# Altium PCB 400797.PcbDoc (part 3 of 8)
Units mm, origin at the board's own origin, x right, y up, seen from the top; angles counter-clockwise.
Board outline 155 x 63.5 mm, 4 copper layers (Top Layer, Mid-Layer 1, Mid-Layer 2, Bottom Layer), stack 1.514 mm thick; 333 components, 292 nets, 1555 pads, 2205 vias.
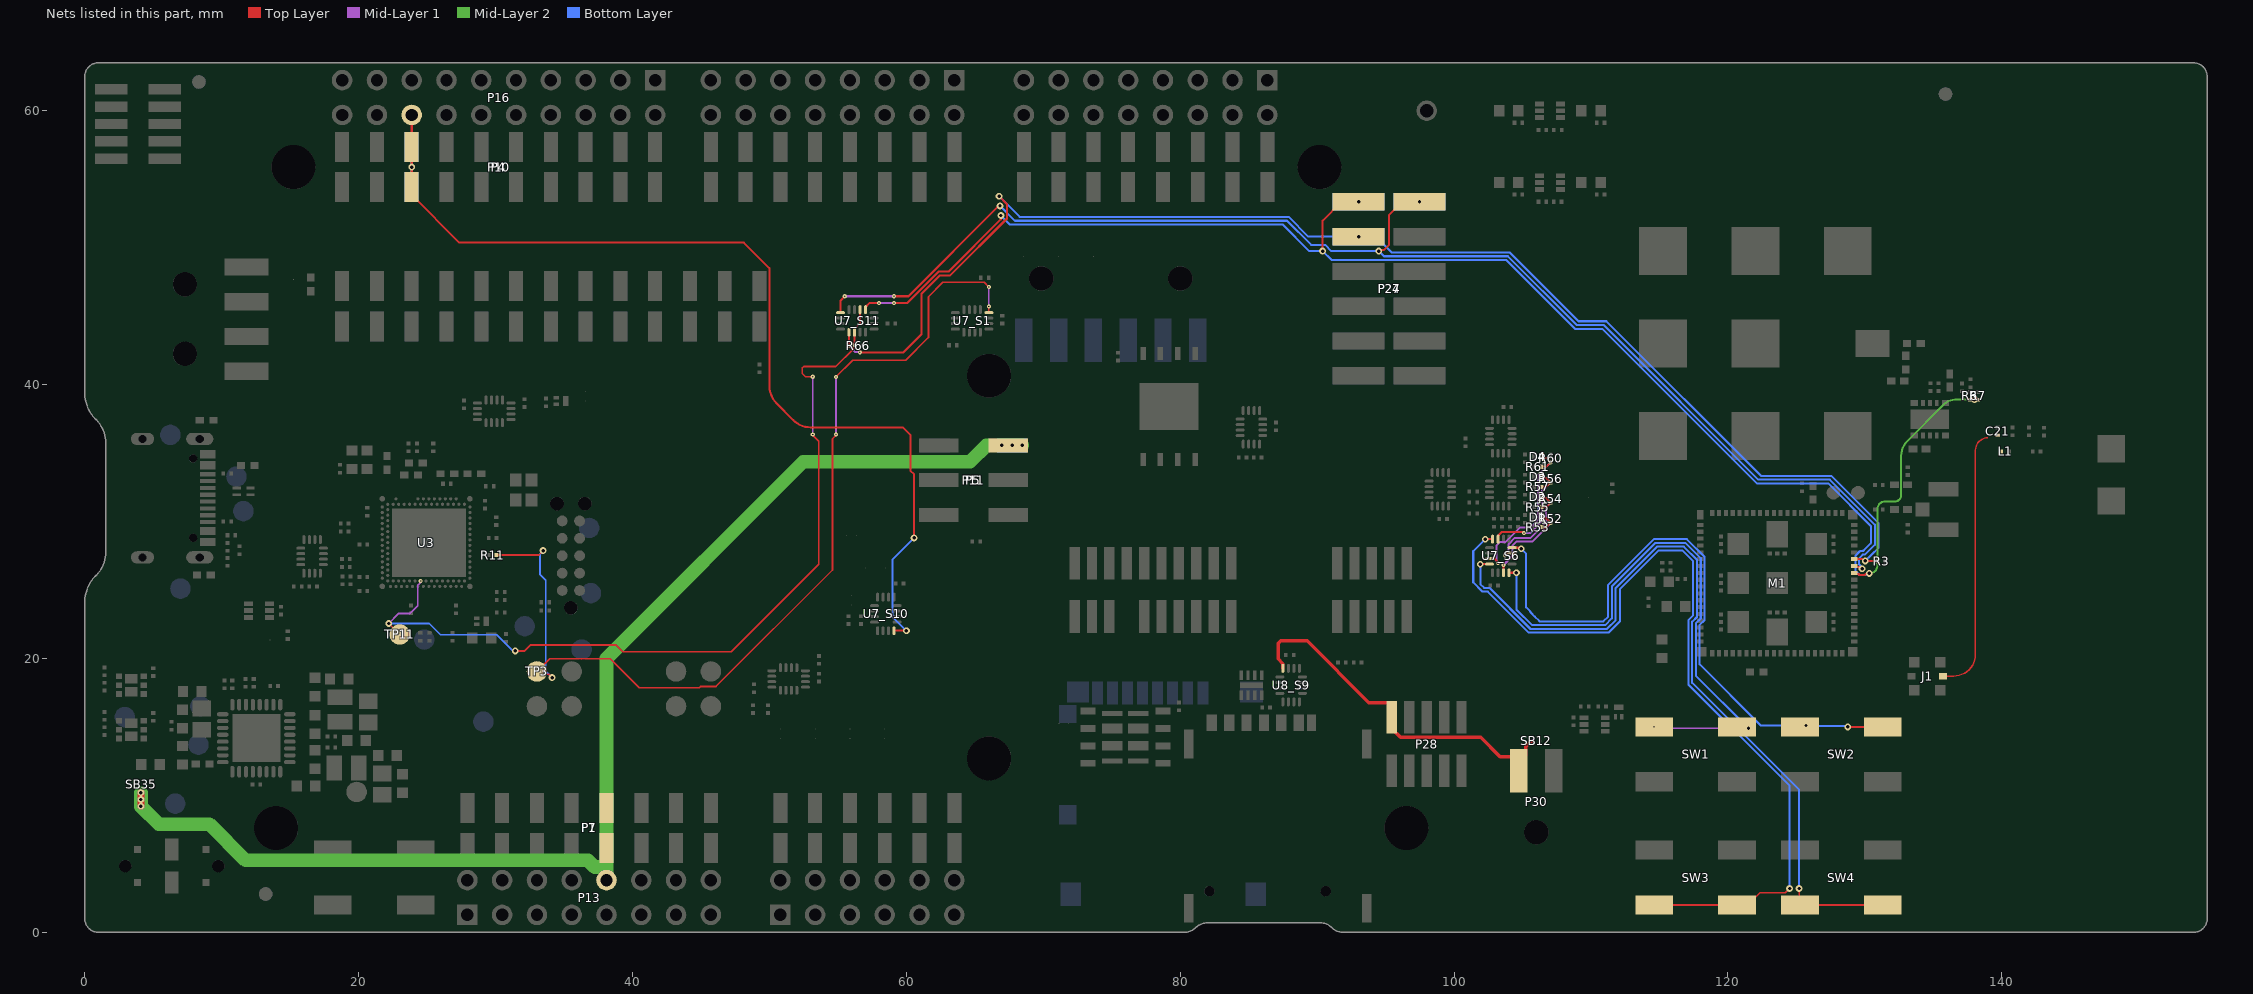
[diagram p4: the nets of this part, all layers, seen from the top]

## Part data (continued)
LOGO2: "Segger logo, small size", Manufacturer=N.A., Part number NEMS=101100004, Artikkelnr Noca=N.A., Author=rsk, Component Class=Markings, Component Status=Active, ComponentLink1Description=Datasheet, ComponentLink1URL=N.A., ComponentLink2Description="Supplier link", ComponentLink2URL=N.A., Footprint Doc="Segger Logo S", HelpURL=N.A., LatestRevisionDate=2016-09-07, Manufacturer Part Number=N.A., Note=N.A., Pad Count=0, Part Number="Segger Logo S", Part number IPS=N.A., Part number Norautron=N.A., PartId=101100004, Published=2016-09-07, Supplier 1=N.A., Supplier 2=N.A., Supplier Part Number 1=N.A., Supplier Part Number 2=N.A.
LOGO3: library part "Nordic Logo lying", "Nordic logo lying", Manufacturer=N.A., Part number NEMS=101100001, Artikkelnr Noca=N.A., Author=rsk, Component Class=Markings, Component Status=Active, ComponentLink1Description=Datasheet, ComponentLink1URL=N.A., ComponentLink2Description="Supplier link", ComponentLink2URL=N.A., Footprint Doc="Nordic Logo", HelpURL=N.A., LatestRevisionDate=2017-03-20, Manufacturer Part Number=N.A., Note=N.A., Pad Count=0, Part Number="Nordic Logo lying", Part number IPS=N.A., Part number Norautron=N.A., PartId=101100001, Published=2017-09-01, Supplier 1=N.A., Supplier 2=N.A., Supplier Part Number 1=N.A., Supplier Part Number 2=N.A.
M1: "Low power System-in-Package with integrated LTE-M/NB-IoT modem and GPS", Manufacturer="Nordic Semiconductor", Part number IPS=N.A., Artikkelnr Noca=N.A., Author=kod1, Component Class=Nordic_Devices, Component Status=Active, ComponentLink1Description=Datasheet, ComponentLink1URL=N.A., ComponentLink2Description="Supplier link", ComponentLink2URL=N.A., Footprint Doc=LGA-113, HelpURL=N.A., LatestRevisionDate=2024-04-29, Manufacturer Part Number=nRF9151-LACAA0A, Note=N.A., Pad Count=113, Part Number=nRF9151-LACAA0A, Part number Norautron=N.A., Published=2024-04-29, Supplier 1="Nordic Semiconductor", Supplier 2=N.A., Supplier Part Number 1=nRF9151-LACAA0A, Supplier Part Number 2=N.A.
P1 P3 P6: library part "Socket 1x8 SMD", "Socket 1x8, 2.54mm (100mil), SMD", Manufacturer=WCON, Manufacturer Part Number=2171-108MS0CUNR1, Part number IPS=00000009963, Part number NEMS=100500412, Part number Norautron=26032369, Artikkelnr Noca=55030002, Author=rsk, Component Class=Connectors, Component Status=Active, ComponentLink1Description=Datasheet, ComponentLink1URL=N.A., ComponentLink2Description="Supplier link", ComponentLink2URL=N.A., Footprint Doc=SOCKET_1x8_SMD, HelpURL=N.A., LatestRevisionDate=2017-10-23, Note=N.A., Pad Count=8, Part Number="Socket 1x8 SMD", PartId=100500412, Published=2016-01-22, Supplier 1=Cabcon, Supplier 2=Samtec, Supplier Part Number 1=2171-108MS0CUNR1, Supplier Part Number 2=SSM-108-F-SV-P-TR, System=Connector
P2: library part "Socket 1x6 SMD", "Socket 1x6, 2.54mm (100mil), SMD", Manufacturer=WCON, Manufacturer Part Number=2171-106MS0CUNR1, Part number IPS=00000009964, Part number NEMS=100500408, Part number Norautron=26032370, Artikkelnr Noca=55030001, Author=rsk, Component Class=Connectors, Component Status=Active, ComponentLink1Description=Datasheet, ComponentLink1URL=N.A., ComponentLink2Description="Supplier link", ComponentLink2URL=N.A., Footprint Doc=SOCKET_1x6_SMD, HelpURL=N.A., LatestRevisionDate=2017-10-23, Note=N.A., Pad Count=6, Part Number="Socket 1x6 SMD", PartId=100500408, Published=2016-01-22, Supplier 1=Cabcon, Supplier 2=Samtec, Supplier Part Number 1=2171-106MS0CUNR1, Supplier Part Number 2=SSM-106-F-SV-P-TR, System=Connector
P4: library part "Socket 1x10 SMD", "Socket 1x10, 2.54mm (100mil), SMD", Manufacturer=WCON, Manufacturer Part Number=2171-110MS0CUNR1, Part number IPS=00000009965, Part number NEMS=100500416, Part number Norautron=26032371, Artikkelnr Noca=55030004, Author=rsk, Component Class=Connectors, Component Status=Active, ComponentLink1Description=Datasheet, ComponentLink1URL=N.A., ComponentLink2Description="Supplier link", ComponentLink2URL=N.A., Footprint Doc=SOCKET_1x10_SMD, HelpURL=N.A., LatestRevisionDate=2016-01-22, Note=N.A., Pad Count=10, Part Number="Socket 1x10 SMD", PartId=100500416, Published=2016-01-22, Supplier 1=Cabcon, Supplier 2=Samtec, Supplier Part Number 1=2171-110MS0CUNR1, Supplier Part Number 2=SSM-110-F-SV-P-TR, System=Connector
P5: library part "Pin Header 2x3 SMD", "Pin Header 2x3, 2.54mm (100mil) SMD", Manufacturer=WCON, Manufacturer Part Number=1125-1203S0M116R1, Part number IPS=00000009966, Part number NEMS=100500242, Part number Norautron=N.A., Artikkelnr Noca=55010007, Author=rsk, Component Class=Connectors, Component Status=Active, ComponentLink1Description=Datasheet, ComponentLink1URL=N.A., ComponentLink2Description="Supplier link", ComponentLink2URL=N.A., Footprint Doc=HDR_2x3-SMD, HelpURL=\\hizz\pro\app9717\Datasheet\connectors\W-CON\1125-12XXXXMXXXXX.PDF, LatestRevisionDate=2016-01-22, Note=SMD, Pad Count=6, Part Number="Pin Header 2x3 SMD", PartId=100500242, Published=2016-01-22, Supplier 1=Cabcon, Supplier 2=Samtec, Supplier Part Number 1=1125-1203S0M116R1, Supplier Part Number 2=TSM-103-01-L-DV, System=Connector
P7 P9 P12: library part "Pin List 1x8 SMD, N.C.", "Pin List 1x8, 2.54mm (100mil), SMD", Manufacturer=WCON, Manufacturer Part Number=1125-1108S0M116R2, Part number IPS=N.A., Part number NEMS=100500330, Artikkelnr Noca=55010006, Assembly="Not mounted", Author=rsk, Component Class=Connectors, Component Status=Active, ComponentLink1Description=Datasheet, ComponentLink1URL=N.A., ComponentLink2Description="Supplier link", ComponentLink2URL=N.A., Footprint Doc=LIST_1x8_SMD, HelpURL=\\hizz\pro\app9717\Datasheet\connectors\W-CON\1125-11XXXXMXXXXX.pdf, LatestRevisionDate=2016-01-22, Note=N.A., Pad Count=8, Part Number="Pin List 1x8 SMD, N.C.", Part number Norautron=N.A., PartId=100500330, Published=2016-01-22, Supplier 1=Cabcon, Supplier 2=Samtec, Supplier Part Number 1=1125-1108S0M116R2, Supplier Part Number 2=TSM-108-01-L-SV-P-TR, System=Connector
P8: library part "Pin List 1x6 SMD, N.C.", "Pin List 1x6, 2.54mm (100mil), SMD", Manufacturer=WCON, Manufacturer Part Number=1125-1106S0M116R2, Part number IPS=N.A., Part number NEMS=100500321, Artikkelnr Noca=55010026, Assembly="Not mounted", Author=rsk, Component Class=Connectors, Component Status=Active, ComponentLink1Description=Datasheet, ComponentLink1URL=N.A., ComponentLink2Description="Supplier link", ComponentLink2URL=N.A., Footprint Doc=LIST_1x6_SMD, HelpURL=\\hizz\pro\app9717\Datasheet\connectors\W-CON\1125-11XXXXMXXXXX.pdf, LatestRevisionDate=2016-03-29, Note=N.A., Pad Count=6, Part Number="Pin List 1x6 SMD, N.C.", Part number Norautron=N.A., PartId=100500321, Published=2016-03-29, Supplier 1=Cabcon, Supplier 2=Samtec, Supplier Part Number 1=1125-1106S0M116R2, Supplier Part Number 2=TSM-106-01-L-SV-P-TR, System=Connector
P10: library part "Pin List 1x10 SMD, N.C.", "Pin List 1x10, 2.54mm (100mil), SMD", Manufacturer=WCON, Manufacturer Part Number=1125-1110S0M116R2, Part number IPS=N.A., Part number NEMS=100500338, Artikkelnr Noca=55010028, Assembly="Not mounted", Author=rsk, Component Class=Connectors, Component Status=Active, ComponentLink1Description=Datasheet, ComponentLink1URL=N.A., ComponentLink2Description="Supplier link", ComponentLink2URL=N.A., Footprint Doc=LIST_1x10_SMD, HelpURL=\\hizz\pro\app9717\Datasheet\connectors\W-CON\1125-11XXXXMXXXXX.pdf, LatestRevisionDate=2016-03-29, Note=N.A., Pad Count=10, Part Number="Pin List 1x10 SMD, N.C.", Part number Norautron=N.A., PartId=100500338, Published=2016-03-29, Supplier 1=Cabcon, Supplier 2=Samtec, Supplier Part Number 1=1125-1110S0M116R2, Supplier Part Number 2=TSM-110-01-L-SV-P-TR, System=Connector
P11: library part "Socket 2x3 SMD Bottom, N.C.", "Socket 2x3, 2.54mm (100mil), SMD", Manufacturer=WCON, Manufacturer Part Number=2171-203MS0CUNR1, Part number IPS=N.A., Part number NEMS=100500434, Artikkelnr Noca=55030010, Assembly="Not mounted", Author=rsk, Component Class=Connectors, Component Status=Active, ComponentLink1Description=Datasheet, ComponentLink1URL=N.A., ComponentLink2Description="Supplier link", ComponentLink2URL=N.A., Footprint Doc=SOCKET_2x3_SMD-2.54mm-bottom, HelpURL=\\hizz\pro\app9717\Datasheet\connectors\W-CON\2171-2XXMXXCUNXX.pdf, LatestRevisionDate=2016-03-29, Note=N.A., Pad Count=6, Part Number="Socket 2x3 SMD Bottom, N.C.", Part number Norautron=N.A., PartId=100500434, Published=2014-06-10, Supplier 1=Cabcon, Supplier 2=Samtec, Supplier Part Number 1=2171-203MS0CUNR1, Supplier Part Number 2=SSM-103-F-DV-P-TR, System=Connector
P13 P15 P17: library part "Pin Header 2x8, N.C.", "Pin Header 2x8, 2.54mm (100mil)", Manufacturer=N.A., Part number NEMS=100500270, Artikkelnr Noca=N.A., Assembly="Not mounted", Author=rsk, Component Class=Connectors, Component Status=Active, ComponentLink1Description=Datasheet, ComponentLink1URL=N.A., ComponentLink2Description="Supplier link", ComponentLink2URL=N.A., Footprint Doc=HDR_2x8, HelpURL=N.A., LatestRevisionDate=2009-12-12, Manufacturer Part Number=N.A., Note=N.A., Pad Count=16, Part Number="Pin Header 2x8, N.C.", Part number IPS=N.A., Part number Norautron=N.A., PartId=100500270, Published=2009-12-12, Supplier 1=N.A., Supplier 2=N.A., Supplier Part Number 1=N.A., Supplier Part Number 2=N.A., System=Connector
P14: library part "Pin Header 2x6, N.C.", "Pin Header 2x6, 2.54mm (100mil)", Manufacturer=N.A., Part number NEMS=100500265, Artikkelnr Noca=N.A., Assembly="Not mounted", Author=rsk, Component Class=Connectors, Component Status=Active, ComponentLink1Description=Datasheet, ComponentLink1URL=N.A., ComponentLink2Description="Supplier link", ComponentLink2URL=N.A., Footprint Doc=HDR_2x6, HelpURL=N.A., LatestRevisionDate=2014-07-04, Manufacturer Part Number=N.A., Note=N.A., Pad Count=12, Part Number="Pin Header 2x6, N.C.", Part number IPS=N.A., Part number Norautron=N.A., PartId=100500265, Published=2009-12-12, Supplier 1=N.A., Supplier 2=N.A., Supplier Part Number 1=N.A., Supplier Part Number 2=N.A., System=Connector
P16: library part "Pin Header 2x10, N.C.", "Pin Header 2x10, 2.54mm (100mil)", Manufacturer=N.A., Part number NEMS=100500274, Artikkelnr Noca=N.A., Assembly="Not mounted", Author=rsk, Component Class=Connectors, Component Status=Active, ComponentLink1Description=Datasheet, ComponentLink1URL=N.A., ComponentLink2Description="Supplier link", ComponentLink2URL=N.A., Footprint Doc=HDR_2x10, HelpURL=N.A., LatestRevisionDate=2017-02-02, Manufacturer Part Number=N.A., Note=N.A., Pad Count=20, Part Number="Pin Header 2x10, N.C.", Part number IPS=N.A., Part number Norautron=N.A., PartId=100500274, Published=2017-01-30, Supplier 1=N.A., Supplier 2=N.A., Supplier Part Number 1=N.A., Supplier Part Number 2=N.A., System=Connector
P18 P19: library part "Pin Header 2x5 SMD, 1.27mm, KS", "Pin Header 2x5, 1.27mm (50mil), SMD, Keying Shroud", Manufacturer=WCON, Manufacturer Part Number=3132-10MS0BK00R1, Part number IPS=00000009968, Part number NEMS=100500261, Part number Norautron=N.A., Artikkelnr Noca=55010009, Author=rsk, Component Class=Connectors, Component Status=Active, ComponentLink1Description=Datasheet, ComponentLink1URL=N.A., ComponentLink2Description="Supplier link", ComponentLink2URL=N.A., Footprint Doc=HDR_2x5-SMD-1.27mm, HelpURL=\\hizz\pro\app9717\Datasheet\connectors\W-CON\3132-XXMXXBK00XX.pdf, LatestRevisionDate=2016-04-21, Note=N.A., Pad Count=10, Part Number="Pin Header 2x5 SMD, 1.27mm, KS", PartId=100500261, Published=2016-01-22, Supplier 1=Cabcon, Supplier 2=Samtec, Supplier Part Number 1=3132-10MS0BK00R1, Supplier Part Number 2=FTSH-105-01-F-DV-K, System=Connector
P20: library part "Pin List 1x13 SMD", "Pin List 1x13, 2.54mm (100mil), SMD", Manufacturer=N.A., Part number IPS=00000002499, Part number NEMS=100500345, Supplier Part Number 1=1125-1113S0M116R2, Artikkelnr Noca=N.A., Author=rsk, Component Class=Connectors, Component Status=Active, ComponentLink1Description=Datasheet, ComponentLink1URL=N.A., ComponentLink2Description="Supplier link", ComponentLink2URL=N.A., Footprint Doc=LIST_1x13_SMD, HelpURL=N.A., LatestRevisionDate=2015-11-10, Manufacturer Part Number=N.A., Note=N.A., Pad Count=13, Part Number="Pin List 1x13 SMD", Part number Norautron=N.A., PartId=100500345, Published=2015-11-10, Supplier 1=Cabcon, Supplier 2=Samtec, Supplier Part Number 2=TSM-113-01-L-SV-P-TR, System=Connector
P22: library part "Pin List Ang 1x4 SMD, 2.54mm", "Pin List 1x4, 2.54mm (100mil), Right Angled, SMD", Manufacturer=WCON, Manufacturer Part Number=1125B-1104S0Z135CR02, Part number IPS=00000004780, Part number NEMS=100500358, Part number Norautron=N.A., Artikkelnr Noca=N.A., Author=rsk, Component Class=Connectors, Component Status=Active, ComponentLink1Description=Datasheet, ComponentLink1URL=N.A., ComponentLink2Description="Supplier link", ComponentLink2URL=N.A., Footprint Doc=LIST_ANG_1x4-SMD-2.54MM, HelpURL=N.A., LatestRevisionDate=2020-04-29, Note=N.A., Pad Count=4, Part Number="Pin List Ang 1x4 SMD, 2.54mm", PartId=100500358, Published=2015-01-23, Supplier 1=Cabcon, Supplier 2=Samtec, Supplier Part Number 1=1125B-1104S0Z135CR02, Supplier Part Number 2=TSM-104-01-L-SH-A, System=Connector
P24 P27: library part "Socket 2x6 SMD", "Socket 2x6, 2.54mm (100mil), SMD", Manufacturer=WCON, Manufacturer Part Number=2171-206MS0CUNR1, Part number IPS=N.A., Part number NEMS=100500439, Artikkelnr Noca=N.A., Author=rsk, Component Class=Connectors, Component Status=Active, ComponentLink1Description=Datasheet, ComponentLink1URL=N.A., ComponentLink2Description="Supplier link", ComponentLink2URL=N.A., Footprint Doc=SOCKET_2x6_SMD-2.54mm, HelpURL=N.A., LatestRevisionDate=2019-04-12, Note=N.A., Pad Count=12, Part Number="Socket 2x6 SMD", Part number Norautron=N.A., PartId=100500439, Published=2019-04-12, Supplier 1=Cabcon, Supplier 2=Samtec, Supplier Part Number 1=2171-206MS0CUNR1, Supplier Part Number 2=SSM-106-F-DV-P-TR, System=Connector
  P27: Assembly="Not mounted"
P25: library part "Pin Header 2x10 SMD, 1.27mm, KS, SWD (Cabcon)", "Pin Header 2x10, 1.27mm (50mil), SMD, Keying Shroud, Removed Pin 7", Manufacturer=WCON, Manufacturer Part Number=3132-20MS0BK00R3, Part number IPS=N.A., Part number NEMS=100500841,100500280, Artikkelnr Noca=N.A., Author=kod1, Component Class=Connectors, Component Status=Active, ComponentLink1Description=Datasheet, ComponentLink1URL=N.A., ComponentLink2Description="Supplier link", ComponentLink2URL=N.A., Footprint Doc=HDR_2x10-SMD-1.27mm-SWD, HelpURL=N.A., LatestRevisionDate=2023-12-14, Note=N.A., Pad Count=19, Part Number="Pin Header 2x10 SMD, 1.27mm, KS, SWD (Cabcon)", Part number Norautron=N.A., PartId=100500841, Published=2023-12-14, Supplier 1=Cabcon, Supplier 2=N.A., Supplier Part Number 1=3132-20MS0BK00R3, Supplier Part Number 2=N.A., System=Connector
P26: library part "Socket 1x13 SMD, N.C.", "Socket 1x13, 2.54mm (100mil), SMD", Manufacturer=WCON, Manufacturer Part Number=2171-113MS0CUNR1, Part number IPS=N.A., Part number NEMS=100500422, Artikkelnr Noca=N.A., Assembly="Not mounted", Author=rsk, Component Class=Connectors, Component Status=Active, ComponentLink1Description=Datasheet, ComponentLink1URL=N.A., ComponentLink2Description="Supplier link", ComponentLink2URL=N.A., Footprint Doc=SOCKET_1x13_SMD, HelpURL=N.A., LatestRevisionDate=2019-05-27, Note=N.A., Pad Count=13, Part Number="Socket 1x13 SMD, N.C.", Part number Norautron=N.A., PartId=100500422, Published=2019-05-27, Supplier 1=Cabcon, Supplier 2=Samtec, Supplier Part Number 1=2171-113MS0CUNR1, Supplier Part Number 2=SSM-113-L-SV-P-TR, System=Connector
P28: library part "Pin Header 2x5 SMD, 1.27mm", "Pin Header 2x5, 1.27mm (50mil), SMD", Manufacturer=WCON, Manufacturer Part Number=1325-1205S0M078R1, Part number IPS=00000009970, Part number NEMS=100500259, Part number Norautron=N.A., Artikkelnr Noca=55019196, Author=rsk, Component Class=Connectors, Component Status=Active, ComponentLink1Description=Datasheet, ComponentLink1URL=N.A., ComponentLink2Description="Supplier link", ComponentLink2URL=N.A., Footprint Doc=HDR_2x5-SMD-1.27mm, HelpURL=http://www.farnell.com/datasheets/81359.pdf, LatestRevisionDate=2016-04-21, Note=N.A., Pad Count=10, Part Number="Pin Header 2x5 SMD, 1.27mm", PartId=100500259, Published=2010-11-25, Supplier 1=Cabcon, Supplier 2=Farnell, Supplier Part Number 1=1325-1205S0M078R1, Supplier Part Number 2=166-7759, System=Connector
P29: library part "Pin List Ang 1x6 SMD, 2.54mm", "Pin List 1x6, 2.54mm (100mil), Right Angled, SMD", Manufacturer=N.A., Part number IPS=00000003922, Part number NEMS=100500362, Supplier Part Number 1=TSM-106-01-L-SH-A, Artikkelnr Noca=N.A., Assembly="Not mounted", Author=rsk, Component Class=Connectors, Component Status=Active, ComponentLink1Description=Datasheet, ComponentLink1URL=N.A., ComponentLink2Description="Supplier link", ComponentLink2URL=N.A., Footprint Doc=LIST_ANG_1x6-SMD-2.54MM, HelpURL=N.A., LatestRevisionDate=2020-04-28, Manufacturer Part Number=N.A., Note=N.A., Pad Count=6, Part Number="Pin List Ang 1x6 SMD, 2.54mm", Part number Norautron=N.A., PartId=100500362, Published=2015-01-23, Supplier 1=Samtec, Supplier 2=Digi-Key, Supplier Part Number 2=S1113E-06-ND, System=Connector
P30: library part "Pin List Ang 1x2 SMD, 2.54mm", "Pin List 1x2, 2.54mm (100mil), Right Angled, SMD", Manufacturer=WCON, Manufacturer Part Number=1125B-1102S0Z135R2, Part number IPS=00000009972, Part number NEMS=100500354, Part number Norautron=N.A., Artikkelnr Noca=55010023, Author=rsk, Component Class=Connectors, Component Status=Active, ComponentLink1Description=Datasheet, ComponentLink1URL=N.A., ComponentLink2Description="Supplier link", ComponentLink2URL=N.A., Footprint Doc=LIST_ANG_1x2-SMD-2.54MM, HelpURL=\\hizz\pro\app9717\Datasheet\connectors\W-CON\1125B-11XXXXZXXXXX.pdf, LatestRevisionDate=2016-05-26, Note=N.A., Pad Count=2, Part Number="Pin List Ang 1x2 SMD, 2.54mm", PartId=100500354, Published=2016-01-22, Supplier 1=Cabcon, Supplier 2=Samtec, Supplier Part Number 1=1125B-1102S0Z135R2, Supplier Part Number 2=TSM-102-01-L-SH-A, System=Connector
Q1 Q7: "Dual N & P Ch MOFET, 1.03A/0.7A, 480mOhm, 450mW", Manufacturer="Diodes Incorporated", Part number IPS=00000007803, Part number NEMS=101300117, Part number Norautron=N.A., Supplier Part Number 1=DMC2400UV-7DICT-ND, Artikkelnr Noca=N.A., Author=rsk, Component Class=Semiconductors, Component Status=Active, ComponentLink1Description=Datasheet, ComponentLink1URL=N.A., ComponentLink2Description="Supplier link", ComponentLink2URL=N.A., Footprint Doc=SOT-563, HelpURL=http://www.diodes.com/_files/datasheets/DMC2400UV.pdf, LatestRevisionDate=2016-01-18, Manufacturer Part Number=DMC2400UV, Note="Dual N & P Channel Digital FET", Pad Count=6, Part Number=DMC2400UV, PartId=101300117, Published=2016-01-18, Supplier 1=Digi-Key, Supplier 2=N.A., Supplier Part Number 2=N.A.
Q2 Q3 Q6: "N-Channel MOSFET, 20V, 1A, 470mOhm, 400mW", Manufacturer="Rohm Semiconductor", Part number IPS=00000009976, Part number NEMS=101300132, Part number Norautron=26320026, Supplier Part Number 1=RV2C010UNT2LCT-ND, Artikkelnr Noca=35010020, Author=rsk, Component Class=Semiconductors, Component Status=Active, ComponentLink1Description=Datasheet, ComponentLink1URL=N.A., ComponentLink2Description="Supplier link", ComponentLink2URL=N.A., Footprint Doc=DFN-3, HelpURL=http://rohmfs.rohm.com/en/products/databook/datasheet/discrete/transistor/mosfet/rv2c010unt2l-e.pdf, LatestRevisionDate=2016-08-09, Manufacturer Part Number=RV2C010UNT2L, Note=N.A., Pad Count=3, Part Number=RV2C010UNT2L, PartId=101300132, Published=2016-08-09, Supplier 1=Digi-Key, Supplier 2=Mouser, Supplier Part Number 2=755-RV2C010UNT2L
Q4 Q5: "Dual N-Channel MOSFET, Vds = 30V, Vgs(th) = 1.5V, Id = 0.5A, Rds = 750mOhm, Pd = 150mW", Manufacturer="Micro Commercial Components", Manufacturer Part Number=UM6X1NA-TP, Part number IPS=N.A., Part number NEMS=101300201, Supplier Part Number 1=353-UM6X1NA-TPCT-ND, Artikkelnr Noca=N.A., Author=rubr, Component Class=Semiconductors, Component Status=Active, ComponentLink1Description=Datasheet, ComponentLink1URL=https://www.mccsemi.com/pdf/Products/UM6X1NA(SOT-563).pdf, ComponentLink2Description="Supplier link", ComponentLink2URL=https://www.digikey.com/en/products/detail/micro-commercial-co/UM6X1NA-TP/16399159, Footprint Doc=SOT-563, HelpURL=https://www.mccsemi.com/product-detail/UM6X1NA, LatestRevisionDate=2023-01-19, Note=N.A., Pad Count=6, Part Number=UM6X1NA, Part number Norautron=N.A., PartId=101300201, Published=2023-01-19, Supplier 1=Digi-Key, Supplier 2=Mouser, Supplier Part Number 2=833-UM6X1NA-TP
Q8 Q9: "Dual P-Channel MOFET, 3.8A, 90mOhm max, 1.4W", Manufacturer="Micro Commercial Components", Part number IPS=N.A., Part number NEMS=101300199, Supplier Part Number 1=MCM2301-TPMSCT-ND, Artikkelnr Noca=N.A., Author=rubr, Component Class=Semiconductors, Component Status=Active, ComponentLink1Description=Datasheet, ComponentLink1URL=https://www.mccsemi.com/pdf/Products/MCM2301(DFN2020-6L).pdf, ComponentLink2Description="Supplier link", ComponentLink2URL=https://www.digikey.com/en/products/detail/micro-commercial-co/MCM2301-TP/9655971, Footprint Doc=VDFN-6, HelpURL=https://www.mccsemi.com/product-detail/MCM2301, LatestRevisionDate=2022-12-27, Manufacturer Part Number=MCM2301, Note=N.A., Pad Count=6, Part Number=MCM2301, Part number Norautron=N.A., PartId=101300199, Published=2022-12-27, Supplier 1=Digi-Key, Supplier 2=Mouser, Supplier Part Number 2=833-MCM2301-TP
R1 R8 R77 R79: library part R0201-10k, "Resistor, ±1%, 0.05W", Manufacturer=N.A., Part number IPS=00000001255, Part number NEMS=100100065, Part number Norautron=26107101, Artikkelnr Noca=N.A., Author=rsk, Component Class=Resistors, Component Status=Active, ComponentLink1Description=Datasheet, ComponentLink1URL=N.A., ComponentLink2Description="Supplier link", ComponentLink2URL=N.A., Footprint Doc=0201, HelpURL=N.A., LatestRevisionDate=2014-11-13, Manufacturer Part Number=N.A., Note="Chip Res 1%", Pad Count=2, Part Number=R0201-10k, PartId=100100065, Published=2014-11-13, Supplier 1=N.A., Supplier 2=N.A., Supplier Part Number 1=N.A., Supplier Part Number 2=N.A.
R2 R6: library part R0201-1k0, "Resistor, ±1%, 0.05W", Manufacturer=N.A., Part number IPS=00000005786, Part number NEMS=100100043, Artikkelnr Noca=N.A., Author=rsk, Component Class=Resistors, Component Status=Active, ComponentLink1Description=Datasheet, ComponentLink1URL=N.A., ComponentLink2Description="Supplier link", ComponentLink2URL=N.A., Footprint Doc=0201, HelpURL=N.A., LatestRevisionDate=2014-11-13, Manufacturer Part Number=N.A., Note="Chip Res 1%", Pad Count=2, Part Number=R0201-1k0, Part number Norautron=N.A., PartId=100100043, Published=2014-11-13, Supplier 1=N.A., Supplier 2=N.A., Supplier Part Number 1=N.A., Supplier Part Number 2=N.A.
R3 R7 R13 R14 R17 R18 R24 R31 R32 R38 R43 R44 R45 R46 R47 R62 R66 R67 R69 R72 R73 R75 R80: library part R0201-1M0, "Resistor, ±1%, 0.05W", Manufacturer=N.A., Part number IPS=00000001418, Part number NEMS=100100093, Part number Norautron=26107108, Artikkelnr Noca=N.A., Author=rsk, Component Class=Resistors, Component Status=Active, ComponentLink1Description=Datasheet, ComponentLink1URL=N.A., ComponentLink2Description="Supplier link", ComponentLink2URL=N.A., Footprint Doc=0201, HelpURL=N.A., LatestRevisionDate=2014-11-13, Manufacturer Part Number=N.A., Note="Chip Res 1%", Pad Count=2, Part Number=R0201-1M0, PartId=100100093, Published=2014-11-13, Supplier 1=N.A., Supplier 2=N.A., Supplier Part Number 1=N.A., Supplier Part Number 2=N.A.
R4: library part R0402-0R, "Resistor, ±5%, 0.063W", Manufacturer=N.A., Part number IPS=00000007128, Part number NEMS=100100109, Supplier Part Number 1=146-9661, Artikkelnr Noca=27049000, Author=rsk, Component Class=Resistors, Component Status=Active, ComponentLink1Description=Datasheet, ComponentLink1URL=N.A., ComponentLink2Description="Supplier link", ComponentLink2URL=N.A., Footprint Doc=0402, HelpURL=N.A., LatestRevisionDate=2009-11-23, Manufacturer Part Number=N.A., Note="Chip Res 5%", Pad Count=2, Part Number=R0402-0R, Part number Norautron=N.A., PartId=100100109, Published=2009-05-08, Supplier 1=Farnell, Supplier 2=N.A., Supplier Part Number 2=N.A.
R9 R23 R59: library part R0201-N.C., "Not mounted", Manufacturer=N.A., Part number NEMS=100100107, Artikkelnr Noca=N.A., Assembly="Not mounted", Author=rsk, Component Class=Resistors, Component Status=Active, ComponentLink1Description=Datasheet, ComponentLink1URL=N.A., ComponentLink2Description="Supplier link", ComponentLink2URL=N.A., Footprint Doc=0201, HelpURL=N.A., LatestRevisionDate=2014-11-13, Manufacturer Part Number=N.A., Note="Chip Res", Pad Count=2, Part Number=R0201-N.C., Part number IPS=N.A., Part number Norautron=N.A., PartId=100100107, Published=2014-11-13, Supplier 1=N.A., Supplier 2=N.A., Supplier Part Number 1=N.A., Supplier Part Number 2=N.A.
R10 R34 R35 R52 R54 R56 R60 R63 R64 R65 R76 R81 R85 R86: library part R0201-100k, "Resistor, ±1%, 0.05W", Manufacturer=N.A., Part number IPS=00000001419, Part number NEMS=100100080, Part number Norautron=26108487, Artikkelnr Noca=N.A., Author=rsk, Component Class=Resistors, Component Status=Active, ComponentLink1Description=Datasheet, ComponentLink1URL=N.A., ComponentLink2Description="Supplier link", ComponentLink2URL=N.A., Footprint Doc=0201, HelpURL=N.A., LatestRevisionDate=2014-11-13, Manufacturer Part Number=N.A., Note="Chip Res 1%", Pad Count=2, Part Number=R0201-100k, PartId=100100080, Published=2014-11-13, Supplier 1=N.A., Supplier 2=N.A., Supplier Part Number 1=N.A., Supplier Part Number 2=N.A.
R11 R12 R15 R16 R19 R20 R22 R25 R26 R27 R28 R29 R30: library part R0201-150, "Resistor, ±1%, 0.05W", Manufacturer=N.A., Part number IPS=00000001420, Part number NEMS=100100029, Artikkelnr Noca=N.A., Author=rsk, Component Class=Resistors, Component Status=Active, ComponentLink1Description=Datasheet, ComponentLink1URL=N.A., ComponentLink2Description="Supplier link", ComponentLink2URL=N.A., Footprint Doc=0201, HelpURL=N.A., LatestRevisionDate=2014-11-13, Manufacturer Part Number=N.A., Note="Chip Res 1%", Pad Count=2, Part Number=R0201-150, Part number Norautron=N.A., PartId=100100029, Published=2014-11-13, Supplier 1=N.A., Supplier 2=N.A., Supplier Part Number 1=N.A., Supplier Part Number 2=N.A.
R21: library part R0201-2R2, "Resistor, ±1%, 0.05W", Manufacturer=N.A., Part number NEMS=100100006, Part number Norautron=26470029, Artikkelnr Noca=N.A., Author=rsk, Component Class=Resistors, Component Status=Active, ComponentLink1Description=Datasheet, ComponentLink1URL=N.A., ComponentLink2Description="Supplier link", ComponentLink2URL=N.A., Footprint Doc=0201, HelpURL=N.A., LatestRevisionDate=2014-11-13, Manufacturer Part Number=N.A., Note="Chip Res 1%", Pad Count=2, Part Number=R0201-2R2, Part number IPS=N.A., PartId=100100006, Published=2014-11-13, Supplier 1=N.A., Supplier 2=N.A., Supplier Part Number 1=N.A., Supplier Part Number 2=N.A.
R33 R39 R40 R41 R42: library part R0201-120, "Resistor, ±1%, 0.05W", Manufacturer=N.A., Part number IPS=00000000880, Part number NEMS=100100028, Part number Norautron=26107076, Artikkelnr Noca=N.A., Author=rsk, Component Class=Resistors, Component Status=Active, ComponentLink1Description=Datasheet, ComponentLink1URL=N.A., ComponentLink2Description="Supplier link", ComponentLink2URL=N.A., Footprint Doc=0201, HelpURL=N.A., LatestRevisionDate=2014-11-13, Manufacturer Part Number=N.A., Note="Chip Res 1%", Pad Count=2, Part Number=R0201-120, PartId=100100028, Published=2014-11-13, Supplier 1=N.A., Supplier 2=N.A., Supplier Part Number 1=N.A., Supplier Part Number 2=N.A.
R36 R74: library part R0201-47k, "Resistor, ±1%, 0.05W", Manufacturer=N.A., Part number IPS=00000001423, Part number NEMS=100100076, Artikkelnr Noca=N.A., Author=rsk, Component Class=Resistors, Component Status=Active, ComponentLink1Description=Datasheet, ComponentLink1URL=N.A., ComponentLink2Description="Supplier link", ComponentLink2URL=N.A., Footprint Doc=0201, HelpURL=N.A., LatestRevisionDate=2014-11-13, Manufacturer Part Number=N.A., Note="Chip Res 1%", Pad Count=2, Part Number=R0201-47k, Part number Norautron=N.A., PartId=100100076, Published=2014-11-13, Supplier 1=N.A., Supplier 2=N.A., Supplier Part Number 1=N.A., Supplier Part Number 2=N.A.
R37 R78: library part R0201-150k, "Resistor, ±1%, 0.05W", Manufacturer=N.A., Part number IPS=00000001422, Part number NEMS=100100082, Artikkelnr Noca=N.A., Author=rsk, Component Class=Resistors, Component Status=Active, ComponentLink1Description=Datasheet, ComponentLink1URL=N.A., ComponentLink2Description="Supplier link", ComponentLink2URL=N.A., Footprint Doc=0201, HelpURL=N.A., LatestRevisionDate=2014-11-13, Manufacturer Part Number=N.A., Note="Chip Res 1%", Pad Count=2, Part Number=R0201-150k, Part number Norautron=N.A., PartId=100100082, Published=2014-11-13, Supplier 1=N.A., Supplier 2=N.A., Supplier Part Number 1=N.A., Supplier Part Number 2=N.A.
R48 R49 R83 R84: library part R0201-4k7, "Resistor, ±1%, 0.05W", Manufacturer=N.A., Part number IPS=00000001706, Part number NEMS=100100061, Artikkelnr Noca=N.A., Author=rsk, Component Class=Resistors, Component Status=Active, ComponentLink1Description=Datasheet, ComponentLink1URL=N.A., ComponentLink2Description="Supplier link", ComponentLink2URL=N.A., Footprint Doc=0201, HelpURL=N.A., LatestRevisionDate=2014-11-13, Manufacturer Part Number=N.A., Note="Chip Res 1%", Pad Count=2, Part Number=R0201-4k7, Part number Norautron=N.A., PartId=100100061, Published=2014-11-13, Supplier 1=N.A., Supplier 2=N.A., Supplier Part Number 1=N.A., Supplier Part Number 2=N.A.
R50 R51: library part R0201-12k, "Resistor, ±1%, 0.05W", Manufacturer=N.A., Part number IPS=00000007891, Part number NEMS=100100066, Part number Norautron=26192279, Artikkelnr Noca=N.A., Author=rsk, Component Class=Resistors, Component Status=Active, ComponentLink1Description=Datasheet, ComponentLink1URL=N.A., ComponentLink2Description="Supplier link", ComponentLink2URL=N.A., Footprint Doc=0201, HelpURL=N.A., LatestRevisionDate=2014-11-13, Manufacturer Part Number=N.A., Note="Chip Res 1%", Pad Count=2, Part Number=R0201-12k, PartId=100100066, Published=2014-11-13, Supplier 1=N.A., Supplier 2=N.A., Supplier Part Number 1=N.A., Supplier Part Number 2=N.A.
R53 R55 R57 R61: library part R0201-18k, "Resistor, ±1%, 0.05W", Manufacturer=N.A., Part number IPS=00000001707, Part number NEMS=100100069, Artikkelnr Noca=N.A., Author=rsk, Component Class=Resistors, Component Status=Active, ComponentLink1Description=Datasheet, ComponentLink1URL=N.A., ComponentLink2Description="Supplier link", ComponentLink2URL=N.A., Footprint Doc=0201, HelpURL=N.A., LatestRevisionDate=2014-11-13, Manufacturer Part Number=N.A., Note="Chip Res 1%", Pad Count=2, Part Number=R0201-18k, Part number Norautron=N.A., PartId=100100069, Published=2014-11-13, Supplier 1=N.A., Supplier 2=N.A., Supplier Part Number 1=N.A., Supplier Part Number 2=N.A.
R58 R87: library part R0201-0R, "Resistor, ±5%, 0.05W", Manufacturer=N.A., Part number IPS=00000003245, Part number NEMS=100100001, Artikkelnr Noca=N.A., Author=rsk, Component Class=Resistors, Component Status=Active, ComponentLink1Description=Datasheet, ComponentLink1URL=N.A., ComponentLink2Description="Supplier link", ComponentLink2URL=N.A., Footprint Doc=0201, HelpURL=N.A., LatestRevisionDate=2017-11-09, Manufacturer Part Number=N.A., Note="Chip Res 5%", Pad Count=2, Part Number=R0201-0R, Part number Norautron=N.A., PartId=100100001, Published=2014-11-13, Supplier 1=N.A., Supplier 2=N.A., Supplier Part Number 1=N.A., Supplier Part Number 2=N.A.
R68: library part R0201-1k87, "Resistor, ±1%, 0.05W", Manufacturer=N.A., Part number NEMS=100100050, Artikkelnr Noca=N.A., Author=rsk, Component Class=Resistors, Component Status=Active, ComponentLink1Description=Datasheet, ComponentLink1URL=N.A., ComponentLink2Description="Supplier link", ComponentLink2URL=N.A., Footprint Doc=0201, HelpURL=N.A., LatestRevisionDate=2019-07-16, Manufacturer Part Number=N.A., Note="Chip Res 1%", Pad Count=2, Part Number=R0201-1k87, Part number IPS=N.A., Part number Norautron=N.A., PartId=100100050, Published=2019-07-16, Supplier 1=N.A., Supplier 2=N.A., Supplier Part Number 1=N.A., Supplier Part Number 2=N.A.
R70 R71: library part R0201-5k1, "Resistor, ±1%, 0.05W", Manufacturer=N.A., Part number NEMS=100100565, Part number Norautron=26192285, Artikkelnr Noca=N.A., Author=rsk, Component Class=Resistors, Component Status=Active, ComponentLink1Description=Datasheet, ComponentLink1URL=N.A., ComponentLink2Description="Supplier link", ComponentLink2URL=N.A., Footprint Doc=0201, HelpURL=N.A., LatestRevisionDate=2016-04-20, Manufacturer Part Number=N.A., Note="Chip Res 1%", Pad Count=2, Part Number=R0201-5k1, Part number IPS=N.A., PartId=100100565, Published=2016-04-20, Supplier 1=N.A., Supplier 2=N.A., Supplier Part Number 1=N.A., Supplier Part Number 2=N.A.
R82: library part R0402-N.C., "Not mounted", Manufacturer=N.A., Part number NEMS=100100281, Artikkelnr Noca=N.A., Assembly="Not mounted", Author=rsk, Component Class=Resistors, Component Status=Active, ComponentLink1Description=Datasheet, ComponentLink1URL=N.A., ComponentLink2Description="Supplier link", ComponentLink2URL=N.A., Footprint Doc=0402, HelpURL=N.A., LatestRevisionDate=2009-05-08, Manufacturer Part Number=N.A., Note="Chip Res", Pad Count=2, Part Number=R0402-N.C., Part number IPS=N.A., Part number Norautron=N.A., PartId=100100281, Published=2009-05-08, Supplier 1=N.A., Supplier 2=N.A., Supplier Part Number 1=N.A., Supplier Part Number 2=N.A.
SB1 SB11 SB12 SB13 SB15 SB16 SB19 SB20 SB22 SB26 SB27 SB29 SB34: Manufacturer=N.A., Part number NEMS=100500458, Artikkelnr Noca=N.A., Author=rsk, Component Class=Connectors, Component Status=Active, ComponentLink1Description=Datasheet, ComponentLink1URL=N.A., ComponentLink2Description="Supplier link", ComponentLink2URL=N.A., Footprint Doc=Solderbridge, HelpURL=N.A., LatestRevisionDate=2009-12-14, Manufacturer Part Number=N.A., Note=N.A., Pad Count=2, Part Number=Solderbridge, Part number IPS=N.A., Part number Norautron=N.A., PartId=100500458, Published=2009-12-14, Supplier 1=N.A., Supplier 2=N.A., Supplier Part Number 1=N.A., Supplier Part Number 2=N.A., System=Connector
SB2 SB3 SB4 SB5 SB6 SB7 SB8 SB9 SB10 SB14 SB17 SB18 SB21 SB23 SB24 SB25 SB28 SB32: library part "Solderbridge Shorted", "Shorted Solderbridge", Manufacturer=N.A., Part number NEMS=100500459, Artikkelnr Noca=N.A., Author=rsk, Component Class=Connectors, Component Status=Active, ComponentLink1Description=Datasheet, ComponentLink1URL=N.A., ComponentLink2Description="Supplier link", ComponentLink2URL=N.A., Footprint Doc=Solderbridge_Shorted, HelpURL=N.A., LatestRevisionDate=2012-08-07, Manufacturer Part Number=N.A., Note=N.A., Pad Count=2, Part Number="Solderbridge Shorted", Part number IPS=N.A., Part number Norautron=N.A., PartId=100500459, Published=2012-08-07, Supplier 1=N.A., Supplier 2=N.A., Supplier Part Number 1=N.A., Supplier Part Number 2=N.A., System=Connector
SB30 SB31 SB33 SB35: library part "Solderbridge Shorted Power", "Shorted Solderbridge Power", Manufacturer=N.A., Part number NEMS=100500460, Artikkelnr Noca=N.A., Author=rsk, Component Class=Connectors, Component Status=Active, ComponentLink1Description=Datasheet, ComponentLink1URL=N.A., ComponentLink2Description="Supplier link", ComponentLink2URL=N.A., Footprint Doc=Solderbridge_Shorted_Power, HelpURL=N.A., LatestRevisionDate=2012-08-07, Manufacturer Part Number=N.A., Note=N.A., Pad Count=2, Part Number="Solderbridge Shorted Power", Part number IPS=N.A., Part number Norautron=N.A., PartId=100500460, Published=2012-08-07, Supplier 1=N.A., Supplier 2=N.A., Supplier Part Number 1=N.A., Supplier Part Number 2=N.A., System=Connector
SW1 SW2 SW3 SW4 SW5: library part L-KLS7-TS6616B-2.5-160-T, "Tactile Switch, SPNO, SMD, 160gf, 6.2x6.4x2.5mm", Manufacturer=KLS, Part number IPS=N.A., Part number NEMS="101500133, 101500001", Artikkelnr Noca=N.A., Author=masi, Component Class=Switches, Component Status=Active, ComponentLink1Description=Datasheet, ComponentLink1URL=N.A., ComponentLink2Description="Supplier link", ComponentLink2URL=N.A., Footprint Doc=L-KLS7-TS6616B-2.5-160-T, HelpURL=\\hizz\pro\app9717\Datasheet\switches\KLS\L-KLS7-TS6616B-2.5-160-T.pdf, LatestRevisionDate=2021-07-02, Manufacturer Part Number=L-KLS7-TS6616B-2.5-160-T, Note=N.A., Pad Count=4, Part Number=L-KLS7-TS6616B-2.5-160-T, Part number Norautron=N.A., PartId=101500133, Published=2021-07-02, Supplier 1=Cabcon, Supplier 2=N.A., Supplier Part Number 1=L-KLS7-TS6616B-2.5-160-T, Supplier Part Number 2=N.A.
SW6: library part Switch-Slide-RA-J-Lead-DPDT-8.5x3.5mm_C&K, "SMD slide Switch (ON-ON)", Manufacturer=C&K, Manufacturer Part Number=JS202011JAQN, Part number IPS=00000007811, Part number NEMS=101500037, Part number Norautron=N.A., Supplier Part Number 1=CKN10722CT-ND, Artikkelnr Noca=N.A., Author=rsk, Component Class=Switches, Component Status=Active, ComponentLink1Description=Datasheet, ComponentLink1URL=N.A., ComponentLink2Description="Supplier link", ComponentLink2URL=N.A., Footprint Doc=Switch-Slide-RA-J-Lead-DPDT-8.5x3.5mm, HelpURL=http://www.ck-components.com/media/1422/js.pdf, LatestRevisionDate=2017-02-01, Note=N.A., Pad Count=6, Part Number=Switch-Slide-RA-J-Lead-DPDT-8.5x3.5mm_C&K, PartId=101500037, Published=2016-09-15, Supplier 1=Digi-Key, Supplier 2=Mouser, Supplier Part Number 2=611-JS202011JAQN
TP1 TP2: library part TP_SMD_Ø1.0MM, "1.0mm circular SMD testpad", Manufacturer="Nordic Semiconductor", Manufacturer Part Number=N.A., Part number NEMS=100500475, Artikkelnr Noca=N.A., Author=rsk, Component Class=Connectors, Component Status=Active, ComponentLink1Description=Datasheet, ComponentLink1URL=N.A., ComponentLink2Description="Supplier link", ComponentLink2URL=N.A., Footprint Doc=TP_SMD_Ø1.0mm, HelpURL=N.A., LatestRevisionDate=2021-03-05, Note=N.A., Pad Count=1, Part Number=TP_SMD_Ø1.0MM, Part number IPS=N.A., Part number Norautron=N.A., PartId=100500475, Published=2013-06-11, Supplier 1=N.A., Supplier 2=N.A., Supplier Part Number 1=N.A., Supplier Part Number 2=N.A.
TP3 TP4 TP5 TP6 TP7 TP8 TP9 TP10 TP11 TP12 TP13 TP14 TP15 TP16 TP17 TP18 TP19 TP20 TP21 TP22 TP23 TP25 TP26 TP27: library part TP_SMD_Ø1.5MM, "1.5mm circular SMD testpad", Manufacturer="Nordic Semiconductor", Manufacturer Part Number=N.A., Part number NEMS=100500477, Artikkelnr Noca=N.A., Author=rsk, Component Class=Connectors, Component Status=Active, ComponentLink1Description=Datasheet, ComponentLink1URL=N.A., ComponentLink2Description="Supplier link", ComponentLink2URL=N.A., Footprint Doc=TP_SMD_Ø1.5mm, HelpURL=N.A., LatestRevisionDate=2021-03-05, Note=N.A., Pad Count=1, Part Number=TP_SMD_Ø1.5MM, Part number IPS=N.A., Part number Norautron=N.A., PartId=100500477, Published=2016-06-02, Supplier 1=N.A., Supplier 2=N.A., Supplier Part Number 1=N.A., Supplier Part Number 2=N.A.
TP24: library part "Testpoint TH", "Testpoint, through hole", Manufacturer=N.A., Part number NEMS=100500464, Artikkelnr Noca=N.A., Author=rsk, Component Class=Connectors, Component Status=Active, ComponentLink1Description=Datasheet, ComponentLink1URL=N.A., ComponentLink2Description="Supplier link", ComponentLink2URL=N.A., Footprint Doc=TESTPAD-TH, HelpURL=N.A., LatestRevisionDate=2009-12-12, Manufacturer Part Number=N.A., Note=N.A., Pad Count=1, Part Number="Testpoint TH", Part number IPS=N.A., Part number Norautron=N.A., PartId=100500464, Published=2009-12-12, Supplier 1=N.A., Supplier 2=N.A., Supplier Part Number 1=N.A., Supplier Part Number 2=N.A.
U1: "2 Line Common mode filter with ESD protection for USB 2.0 interface", Manufacturer=STMicroelectronics, Part number IPS=N.A., Part number NEMS=100800034, Supplier Part Number 1=497-13420-2-ND, Artikkelnr Noca=N.A., Author=eisk, Component Class=Filters, Component Status=Active, ComponentLink1Description=Datasheet, ComponentLink1URL=https://www.st.com/content/ccc/resource/technical/document/datasheet/group3/1c/93/cf/72/85/cf/4d/d6/DM00039389/files/DM00039389.pdf/jcr:content/translations/en.DM00039389.pdf, ComponentLink2Description="Supplier link", ComponentLink2URL=https://www.digikey.com/en/products/detail/stmicroelectronics/ECMF02-4CMX8/3770020, Footprint Doc=UFDFN-8, HelpURL=https://www.st.com/content/ccc/resource/technical/document/datasheet/group3/1c/93/cf/72/85/cf/4d/d6/DM00039389/files/DM00039389.pdf/jcr:content/translations/en.DM00039389.pdf, LatestRevisionDate=2024-01-31, Manufacturer Part Number=ECMF02-4CMX8, Note=N.A., Pad Count=8, Part Number=ECMF02-4CMX8, Part number Norautron=N.A., PartId=100800034, Published=2024-01-31, Supplier 1=Digi-Key, Supplier 2=Mouser, Supplier Part Number 2=511-ECMF02-4CMX8
U2: "GNSS Low-Noise Amplifier Front-End Module with Integrated Pre-Filter and Post-Filter", Manufacturer=Skyworks, Part number IPS=00000002997, Part number NEMS=101900584, Part number Norautron=N.A., Supplier Part Number 1=863-2032-1-ND, Artikkelnr Noca=N.A., Author=rsk, Component Class=Misc_ICs, Component Status=Active, ComponentLink1Description=Datasheet, ComponentLink1URL=http://www.skyworksinc.com/uploads/documents/SKY65943_11_204404F.pdf, ComponentLink2Description="Supplier link", ComponentLink2URL=https://www.digikey.com/product-detail/en/skyworks-solutions-inc/SKY65943-11/863-2032-1-ND, Footprint Doc=MCM-10, HelpURL=http://www.skyworksinc.com/Product/3579/SKY65943-11, LatestRevisionDate=2019-04-16, Manufacturer Part Number=SKY65943-11, Note=N.A., Pad Count=10, Part Number=SKY65943-11, PartId=101900584, Published=2019-04-16, Supplier 1=Digi-Key, Supplier 2=Mouser, Supplier Part Number 2=873-SKY65943-11
U3: library part nRF5340-QKAAD0, "Multi-protocol Bluetooth Low Energy, IEEE 802.15.4, ANT and 2.4GHz proprietary system-on-chip", Manufacturer="Nordic Semiconductor", Part number IPS=N.A., Part number NEMS=102000216, Part number Norautron=NOD26470035, Artikkelnr Noca=N.A., Author=rsk, Component Class=Nordic_Devices, Component Status=Active, ComponentLink1Description=Datasheet, ComponentLink1URL=N.A., ComponentLink2Description="Supplier link", ComponentLink2URL=N.A., Footprint Doc=AQFN-98, HelpURL=N.A., LatestRevisionDate=2020-12-02, Manufacturer Part Number=nRF5340-QKAAD0, Note=N.A., Pad Count=98, Part Number=nRF5340-QKAAD0, PartId=102000216, Published=2020-12-02, Supplier 1="Nordic Semiconductor", Supplier 2=N.A., Supplier Part Number 1=nRF5340-QKAAD0, Supplier Part Number 2=N.A.
U4: library part GD25WB256EYIG, "Quad Serial Flash, 256Mbit, 104MHz, 1.65V - 3.6V", Manufacturer=GigaDevice, Part number IPS=N.A., Part number NEMS=101900774, Artikkelnr Noca=N.A., Author=rubr, Component Class=Misc_ICs, Component Status=Active, ComponentLink1Description=Datasheet, ComponentLink1URL=https://www.gigadevice.com.cn/Public/Uploads/uploadfile/files/20220714/DS-00863-GD25WB256E-Rev1.1.pdf, ComponentLink2Description="Supplier link", ComponentLink2URL=N.A., Footprint Doc=WSON-8, HelpURL=https://www.gigadevice.com/product/flash/product-series/spi-nor-flash/gd25wb256e.html, LatestRevisionDate=2023-03-27, Manufacturer Part Number=GD25WB256EYIG, Note=N.A., Pad Count=8, Part Number=GD25WB256EYIG, Part number Norautron=N.A., PartId=101900774, Published=2023-03-27, Supplier 1=N.A., Supplier 2=N.A., Supplier Part Number 1=N.A., Supplier Part Number 2=N.A.
U5: library part PCAL6408AHK, "8-bit I2C-bus I/O expander with interrupt output", Manufacturer="NXP Semiconductors", Part number IPS=00000009987, Part number NEMS=101900289, Part number Norautron=N.A., Supplier Part Number 1=568-9944-1-ND, Artikkelnr Noca=15079321, Author=rsk, Component Class=Misc_ICs, Component Status=Active, ComponentLink1Description=Datasheet, ComponentLink1URL=N.A., ComponentLink2Description="Supplier link", ComponentLink2URL=N.A., Footprint Doc=XQFN-16, HelpURL=http://www.nxp.com/documents/data_sheet/PCAL6408A.pdf, LatestRevisionDate=2015-04-29, Manufacturer Part Number=PCAL6408AHK, Note=N.A., Pad Count=16, Part Number=PCAL6408AHK, PartId=101900289, Published=2015-04-29, Supplier 1=Digi-Key, Supplier 2=Mouser, Supplier Part Number 2=771-PCAL6408AHKX
U6: library part M2M_UICC, "M2M UICC SIM Card", Manufacturer=N.A., Part number NEMS=101900595, Artikkelnr Noca=N.A., Assembly="Not mounted", Author=rsk, Component Class=Misc_ICs, Component Status=Active, ComponentLink1Description=Datasheet, ComponentLink1URL=N.A., ComponentLink2Description="Supplier link", ComponentLink2URL=N.A., Footprint Doc=SON-8, HelpURL=N.A., LatestRevisionDate=2019-10-22, Manufacturer Part Number=N.A., Note=N.A., Pad Count=8, Part Number=M2M_UICC, Part number IPS=N.A., Part number Norautron=N.A., PartId=101900595, Published=2019-10-22, Supplier 1=N.A., Supplier 2=N.A., Supplier Part Number 1=N.A., Supplier Part Number 2=N.A.
U7_S1 U7_S2 U7_S3 U7_S4 U7_S5 U7_S6 U7_S8 U7_S10 U7_S11: "Data / Audio Low-Voltage Dual DPDT Analog Switch", Manufacturer="ON Semiconductor", Part number IPS=00000009986, Part number NEMS=101900422, Part number Norautron=26500608, Supplier Part Number 1=FSA2466UMXCT-ND, Artikkelnr Noca=15070069, Author=rsk, Component Class=Misc_ICs, Component Status=Active, ComponentLink1Description=Datasheet, ComponentLink1URL=N.A., ComponentLink2Description="Supplier link", ComponentLink2URL=N.A., Footprint Doc=UFQFN-16, HelpURL=https://www.onsemi.com/pub/Collateral/FSA2466-D.PDF, LatestRevisionDate=2019-05-15, Manufacturer Part Number=FSA2466UMX, Note=N.A., Pad Count=16, Part Number=FSA2466UMX, PartId=101900422, Published=2016-05-18, Supplier 1=Digi-Key, Supplier 2=Mouser, Supplier Part Number 2=512-FSA2466UMX
U8_S7 U8_S9: library part NX3DV2567GU, "Low-ohmic four-pole double-throw analog switch", Manufacturer="NXP Semiconductors", Part number IPS=00000007816, Part number NEMS=101900290, Part number Norautron=N.A., Supplier Part Number 1=568-5206-1-ND, Artikkelnr Noca=15079317, Author=rsk, Component Class=Misc_ICs, Component Status=Active, ComponentLink1Description=Datasheet, ComponentLink1URL=N.A., ComponentLink2Description="Supplier link", ComponentLink2URL=N.A., Footprint Doc=XQFN-16, HelpURL=http://www.nxp.com/documents/data_sheet/NX3DV2567.pdf, LatestRevisionDate=2015-02-17, Manufacturer Part Number=NX3DV2567GU, Note=N.A., Pad Count=16, Part Number=NX3DV2567GU, PartId=101900290, Published=2015-02-17, Supplier 1=Digi-Key, Supplier 2=Mouser, Supplier Part Number 2=771-NX3DV2567GU115
U9: "Li-Ion/Li-Polymer USB-C battery charger with high efficiency buck regulators, LDOs or load switches, LED drivers, TWI and VBUSOUT", Manufacturer="Nordic Semiconductor", Part number IPS=N.A., Part number NEMS=102000291, Artikkelnr Noca=N.A., Author=eisk, Component Class=Nordic_Devices, Component Status=Active, ComponentLink1Description=Datasheet, ComponentLink1URL=N.A., ComponentLink2Description="Supplier link", ComponentLink2URL=N.A., Footprint Doc=QFN-32, HelpURL=N.A., LatestRevisionDate=2023-05-25, Manufacturer Part Number=nPM1300-QEAA, Note=N.A., Pad Count=33, Part Number=nPM1300-QEAA, Part number Norautron=N.A., PartId=102000291, Published=2022-02-17, Supplier 1="Nordic Semiconductor", Supplier 2=N.A., Supplier Part Number 1=nPM1300-QEAA, Supplier Part Number 2=N.A.
X1: library part XTAL_SMD2016_32MHz_8pF_Kyocera, "XTAL SMD 2016, 32MHz, Cl=8pF, Tot: ±40ppm", Manufacturer=Kyocera, Manufacturer Part Number=CX2016DB32000D0WZRC1, Part number IPS=00000007827, Part number NEMS=101600039, Part number Norautron=26511136, Supplier Part Number 1=1253-1586-1-ND, Artikkelnr Noca=22010022, Author=rsk, Component Class=Oscillators, Component Status=Active, ComponentLink1Description=Datasheet, ComponentLink1URL=N.A., ComponentLink2Description="Supplier link", ComponentLink2URL=N.A., Footprint Doc=XTAL_2016, HelpURL=http://media.digikey.com/pdf/Data%20Sheets/AVX%20PDFs/CX2016DB32000D0WZRC1_Spec.pdf, LatestRevisionDate=2016-06-02, Note="XTAL SMD 32.000MHz", Pad Count=4, Part Number=XTAL_SMD2016_32MHz_8pF_Kyocera, PartId=101600039, Published=2015-10-15, Supplier 1=Digi-Key, Supplier 2=N.A., Supplier Part Number 2=N.A.
Y1 Y2: library part "SHUNT JUMPER 2.54mm BLACK GOLD Horizontal (obsolete)", "Shunt Jumper 2.54mm Black", Manufacturer=3M, Manufacturer Part Number=969102-0000-DA, Part Number="SHUNT JUMPER 2.54mm BLACK GOLD Horizontal (Obsolete)", Part number IPS=00000001916, Part number NEMS=100500644, Part number Norautron=N.A., Supplier Part Number 1=3M9580-ND, Artikkelnr Noca=56099001, Author=rsk, Component Class=Connectors, Component Status=Obsolete, ComponentLink1Description=Datasheet, ComponentLink1URL=N.A., ComponentLink2Description="Supplier link", ComponentLink2URL=N.A., Footprint Doc="SHUNT JUMPER 2.54mm", HelpURL=http://www.digikey.com/product-detail/en/969102-0000-DA, LatestRevisionDate=2021-06-28, Note="SHUNT JUMPER .1\" BLACK GOLD, h=6.00mm, w=5.00mm", Pad Count=2, PartId=100500644, Published=2019-09-04, Supplier 1=Digi-Key, Supplier 2=N.A., Supplier Part Number 2=N.A., System=Connector
  Y1: Assembly="Placed on \"VDD\" pins of P22"
  Y2: Assembly="Placed on P30"

## Free pads (board coordinates)
  round 3.2 hole 3.2 unplated: 1(13.97,7.621) 1(15.24,55.881) 1(66.04,12.701) 1(66.04,40.641) 1(90.17,55.881) 1(96.52,7.621)

## Via types
v1: diameter 0.5, hole 0.25, Top Layer to Bottom Layer, tented both sides, 1614 vias
v2: diameter 0.3, hole 0.1, Top Layer to Mid-Layer 1, tented top, 485 vias
v3: diameter 0.3, hole 0.1, Top Layer to Mid-Layer 1, tented both sides, 97 vias
v4: diameter 0.61, hole 0.305, Top Layer to Bottom Layer, tented both sides, 9 vias